# Altium PCB PCB1.PcbDoc
Units mm, origin at the board's own origin, x right, y up, seen from the top; angles counter-clockwise.
Board outline 13 x 34 mm, 2 copper layers (Top Layer, Bottom Layer); 2 components, 4 nets, 13 pads, 0 vias.
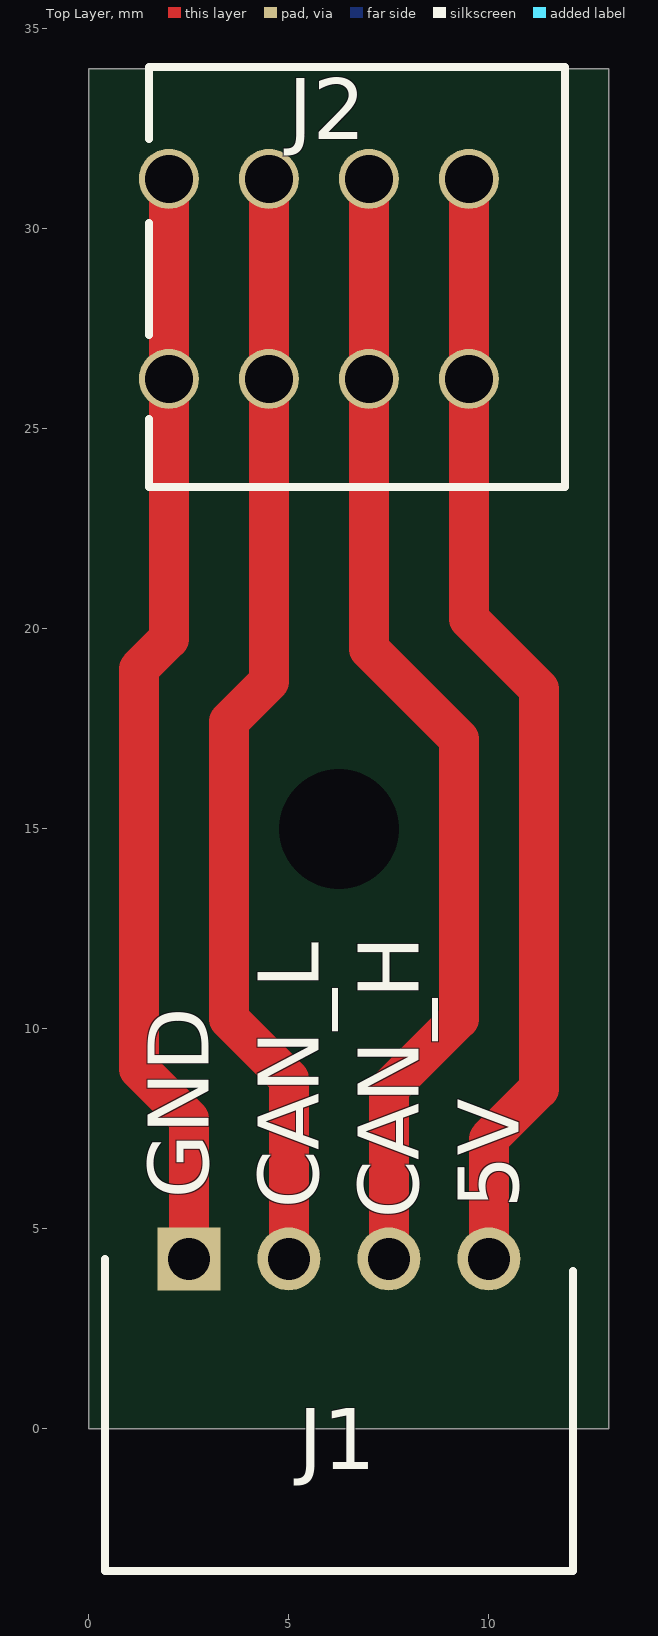
[diagram p0: Top Layer view]
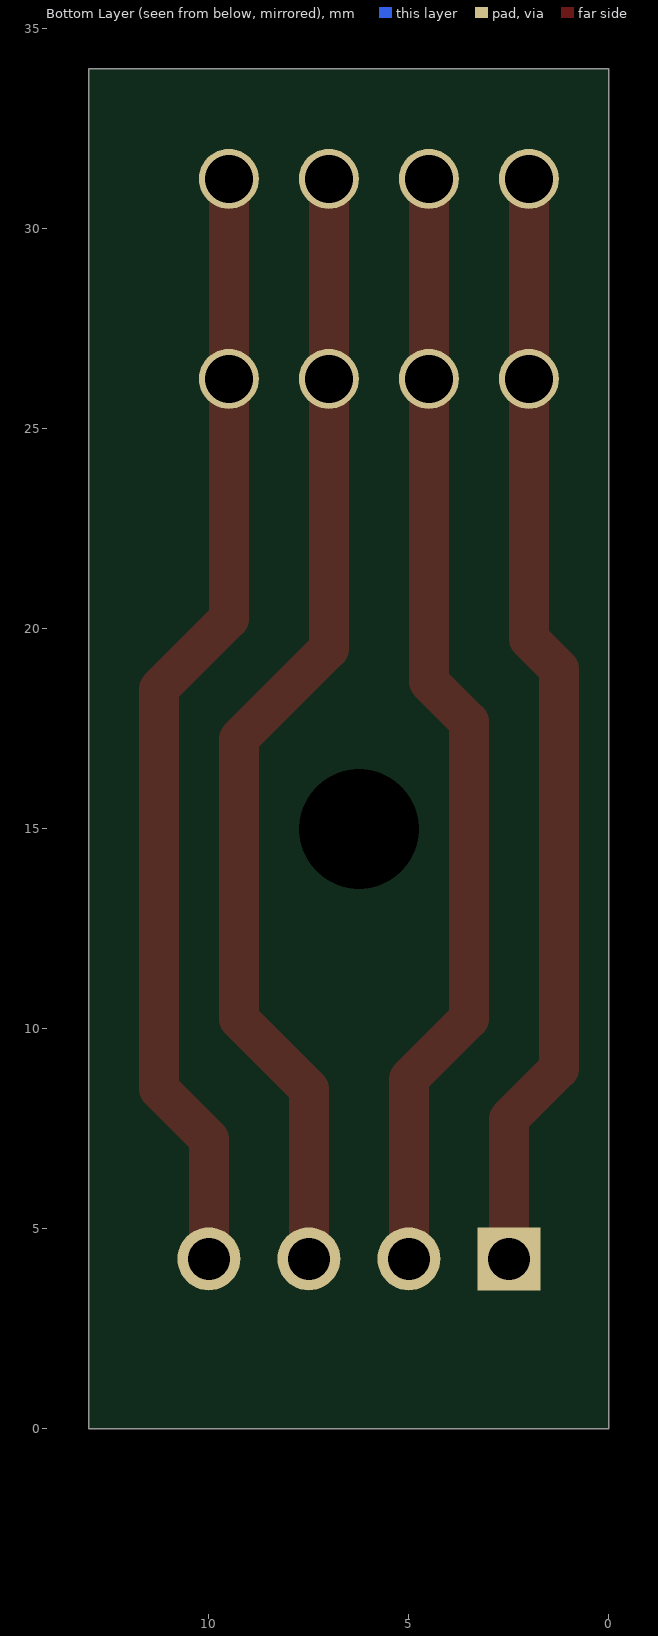
[diagram p1: Bottom Layer view, seen from below]

## Layer stack, top to bottom
Top Solder: solder mask 0.0102, Solder Resist, Dk 3.5
Top Layer: signal copper 0.0356
Dielectric 1: dielectric 0.32, FR-4, Dk 4.8
Bottom Layer: signal copper 0.0356
Bottom Solder: solder mask 0.0102, Solder Resist, Dk 3.5

## Board outline
0,0 0,34 13,34 13,0

## Design rules (kind name [scope] priority, off if disabled: settings)
Clearance [All] p1: gap=0.254 ignorepadtopadclearanceinfootprint=FALSE except(0: Arc-Hole Track-Hole SMDPad-Hole THPad-Hole Via-Hole Fill-Hole Poly-Hole Region-Hole Text-Hole)
PolygonConnect [All] p1: connectstyle=Relief reliefconductorwidth=0.254 reliefentries=4 polygonreliefangle="90 Angle" airgapwidth=0.254
RoutingVias [All] p1: holewidth=0.711 width=1.27 viastyle="Through Hole" minholewidth=0.711 minwidth=1.27 maxholewidth=0.711 maxwidth=1.27
SolderMaskExpansion [All] p1: expansion=0.102 istentingtop=FALSE
Width [All] p1: maxlimit=1 minlimit=0.254 preferedwidth=1 minimp=50.000000 maximp=50.000000 favimp=50.000000
30 further rules are at their usual default settings.

## Components (designator, comment, footprint, x,y, rotation, side; value= is the part's Value field where it differs from the comment)
J1 "1778641" SHDRRA4W60P0X250_1X4_1170X750X510P 2.5,4.25 r180 top
J2 "Connector_4" "PTSM 0,5/ 4-2,5-H THR WH R32" 9.5,31.25 r180 top

## Footprints (in the part's own frame and the unit in brackets; to place one, negate y for a bottom-side part, rotate by r counter-clockwise, add the part's x,y. Pads: shape width x height; smd on the part's side, far side on the other; paste and mask are expansions set on the pad)
"PTSM 0,5/ 4-2,5-H THR WH R32" [mm]
  round 1.5 hole 1.2 paste-2539.97: 1(0,5) 1(0,0) 2(2.5,5) 2(2.5,0) 3(5,5) 3(5,0) 4(7.5,0) 4(7.5,5)
  silkscreen extent -2.4,-2.8 8,7.7, body extent -2.35,-2.8 8.15,7.2, height 5
SHDRRA4W60P0X250_1X4_1170X750X510P [mm]
  rect 1.575x1.575 / inner round 1.575 / far side rect 1.575x1.575 hole 1.05: 1(0,0)
  round 1.575 hole 1.05: 2(-2.5,0) 3(-5,0) 4(-7.5,0)
  silkscreen extent -9.6,0 2.1,7.8, body extent -9.55,-0.3 2.17,7.2, height 5.02

## Part data
J1: "PCB header, nominal cross section: 0.5 mm?, color: black, nominal current: 6 A, rated voltage (III/2): 160 V, contact surface: Tin, type of contact: Male connector, Number of potentials: 4, Number of rows: 1, Number of positions per row: 4, number of connections: 4, product range: PTSM 0,5/..-HH-THR, pitch: 2.5 mm, mounting: THR soldering, pin layout: Linear pinning, solder pin [P]: 2.1 mm, Stecksystem: COMBICON COMPACT PTSM, Locking: without, type of packaging: 32 mm wide tape", Manufacturer_Name="Phoenix Contact", Mouser Part Number=651-1778641, Arrow Part Number=1778641, Arrow Price/Stock=https://www.arrow.com/en/products/1778641/phoenix-contact?region=nac, Datasheet Link=http://www.phoenixcontact.com/de/produkte/1778641/pdf, Geometry.Height=5.1mm, Manufacturer_Part_Number=1778641, Mouser Price/Stock=https://www.mouser.co.uk/ProductDetail/Phoenix-Contact/1778641?qs=i0qWf6NAoDs%252BwkQoFV1ycQ%3D%3D

## Free pads (board coordinates)
  round 1.524 hole 3: 1(6.25,15)

## Nets (pads, with @x,y where several pads share a name; then routed paths per layer and width w, separated by ;. In a path a pad name is that pad's centre, name@x,y a point inside that pad or via, vN(x,y) a via of type N, cw(c..) or ccw(c..) an arc to the next point about the centre after c; other vN are vias at no path point)
NetJ1_1: J1.1 J2.4 | length 27.8
  Top Layer w1: J2.4@2,31.25 2,26.25 2,19.75 1.25,19 1.25,9 2.5,7.75 J1.1
NetJ1_2: J1.2 J2.3 | length 28
  Top Layer w1: J2.3@4.5,31.25 4.5,26.25 4.5,18.682 3.5,17.682 3.5,10.25 5,8.75 J1.2
NetJ1_3: J1.3 J2.2 | length 28.7
  Top Layer w1: J2.2@7,31.25 7,26.25 7,19.5 9.25,17.25 9.25,10.25 7.5,8.5 J1.3
NetJ1_4: J1.4 J2.1 | length 28.2
  Top Layer w1: J2.1@9.5,31.25 9.5,26.25 9.5,20.25 11.25,18.5 11.25,8.5 10,7.25 J1.4

## Silkscreen, mask and mechanical layers (free items; w line width, h text height)
Top Overlay:
  text "GND" at 2.996,5.754 h1.52 r90
  text "CAN_L" at 5.742,5.504 h1.52 r90
  text "5V" at 10.746,5.504 h1.52 r90
  text "CAN_H" at 8.242,5.254 h1.52 r90
Mechanical 1:
  the board outline again, w0.254